# Altium PCB PCB2.0.PcbDoc (part 1 of 2)
Units mm, origin at the board's own origin, x right, y up, seen from the top; angles counter-clockwise.
Board outline 68 x 50 mm, 4 copper layers (Top Layer, GND, VDD3V3, Bottom Layer), stack 0.778 mm thick; 115 components, 143 nets, 635 pads, 198 vias.
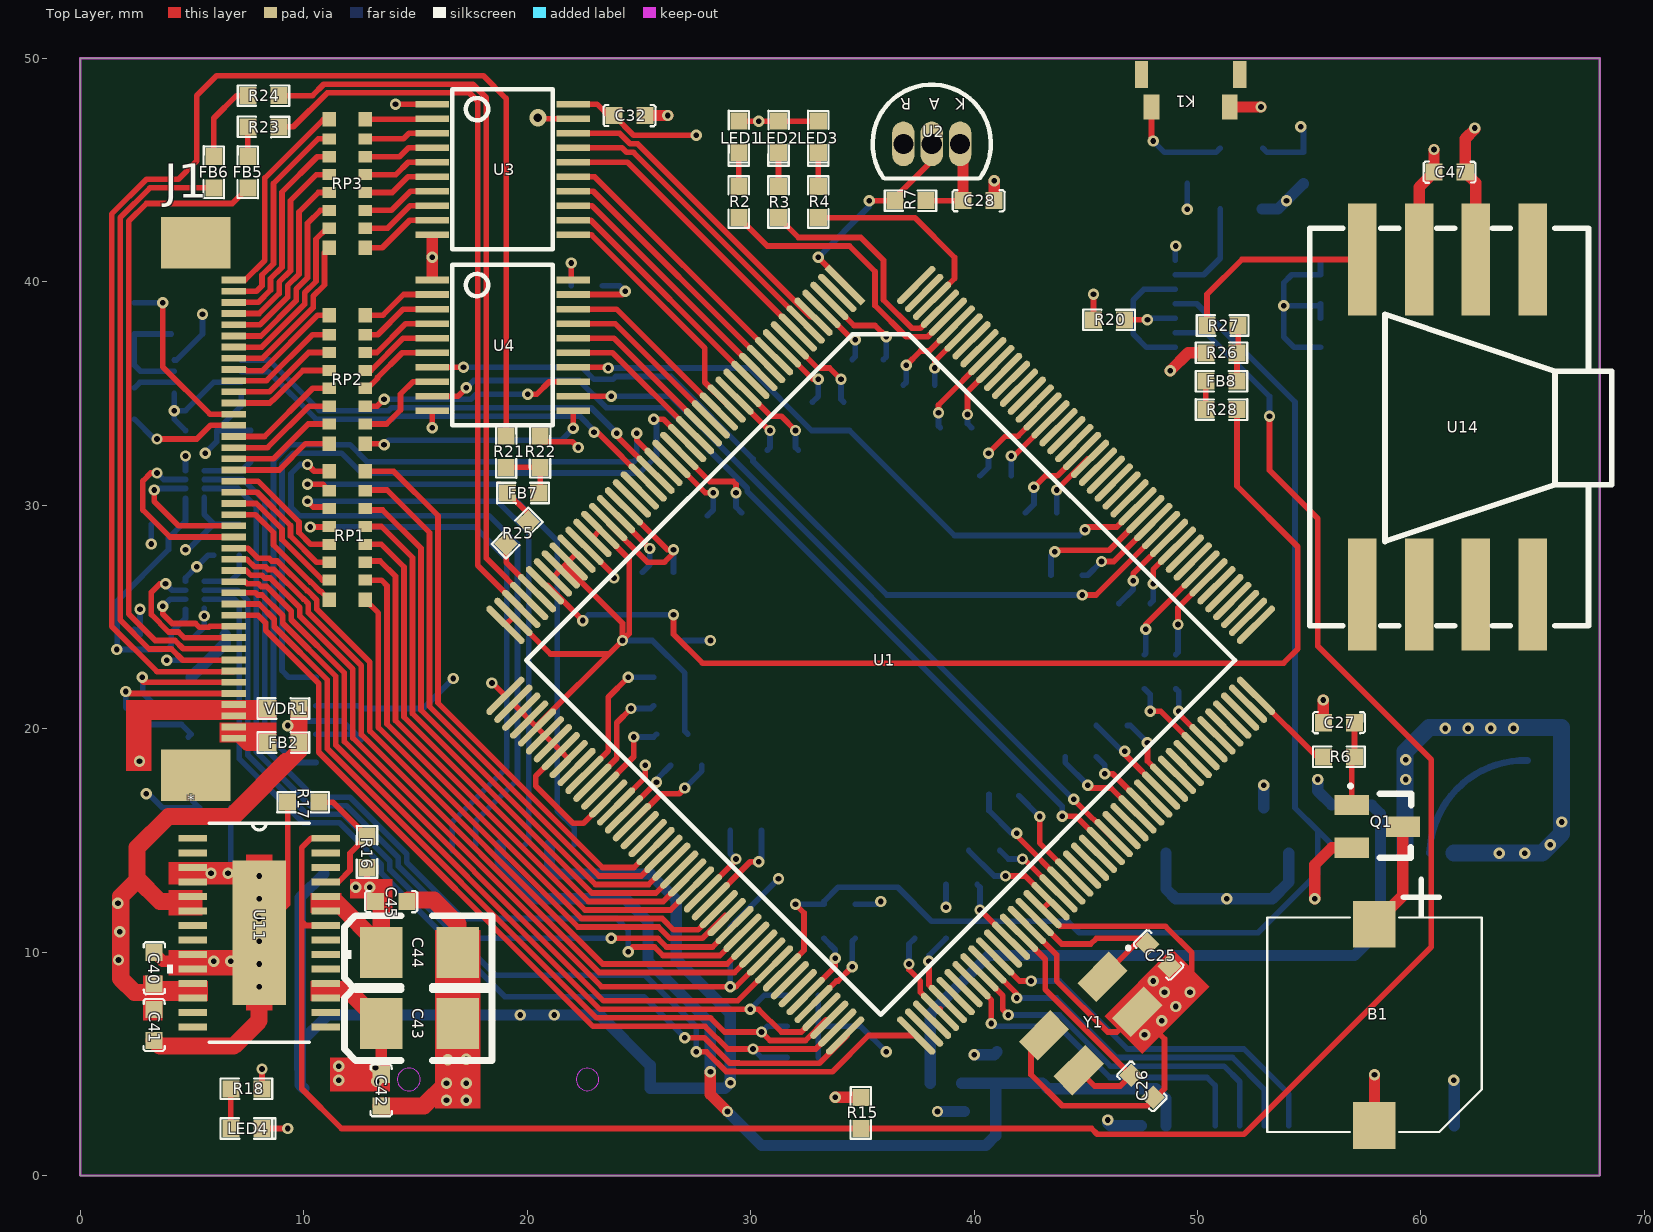
[diagram p0: Top Layer view]
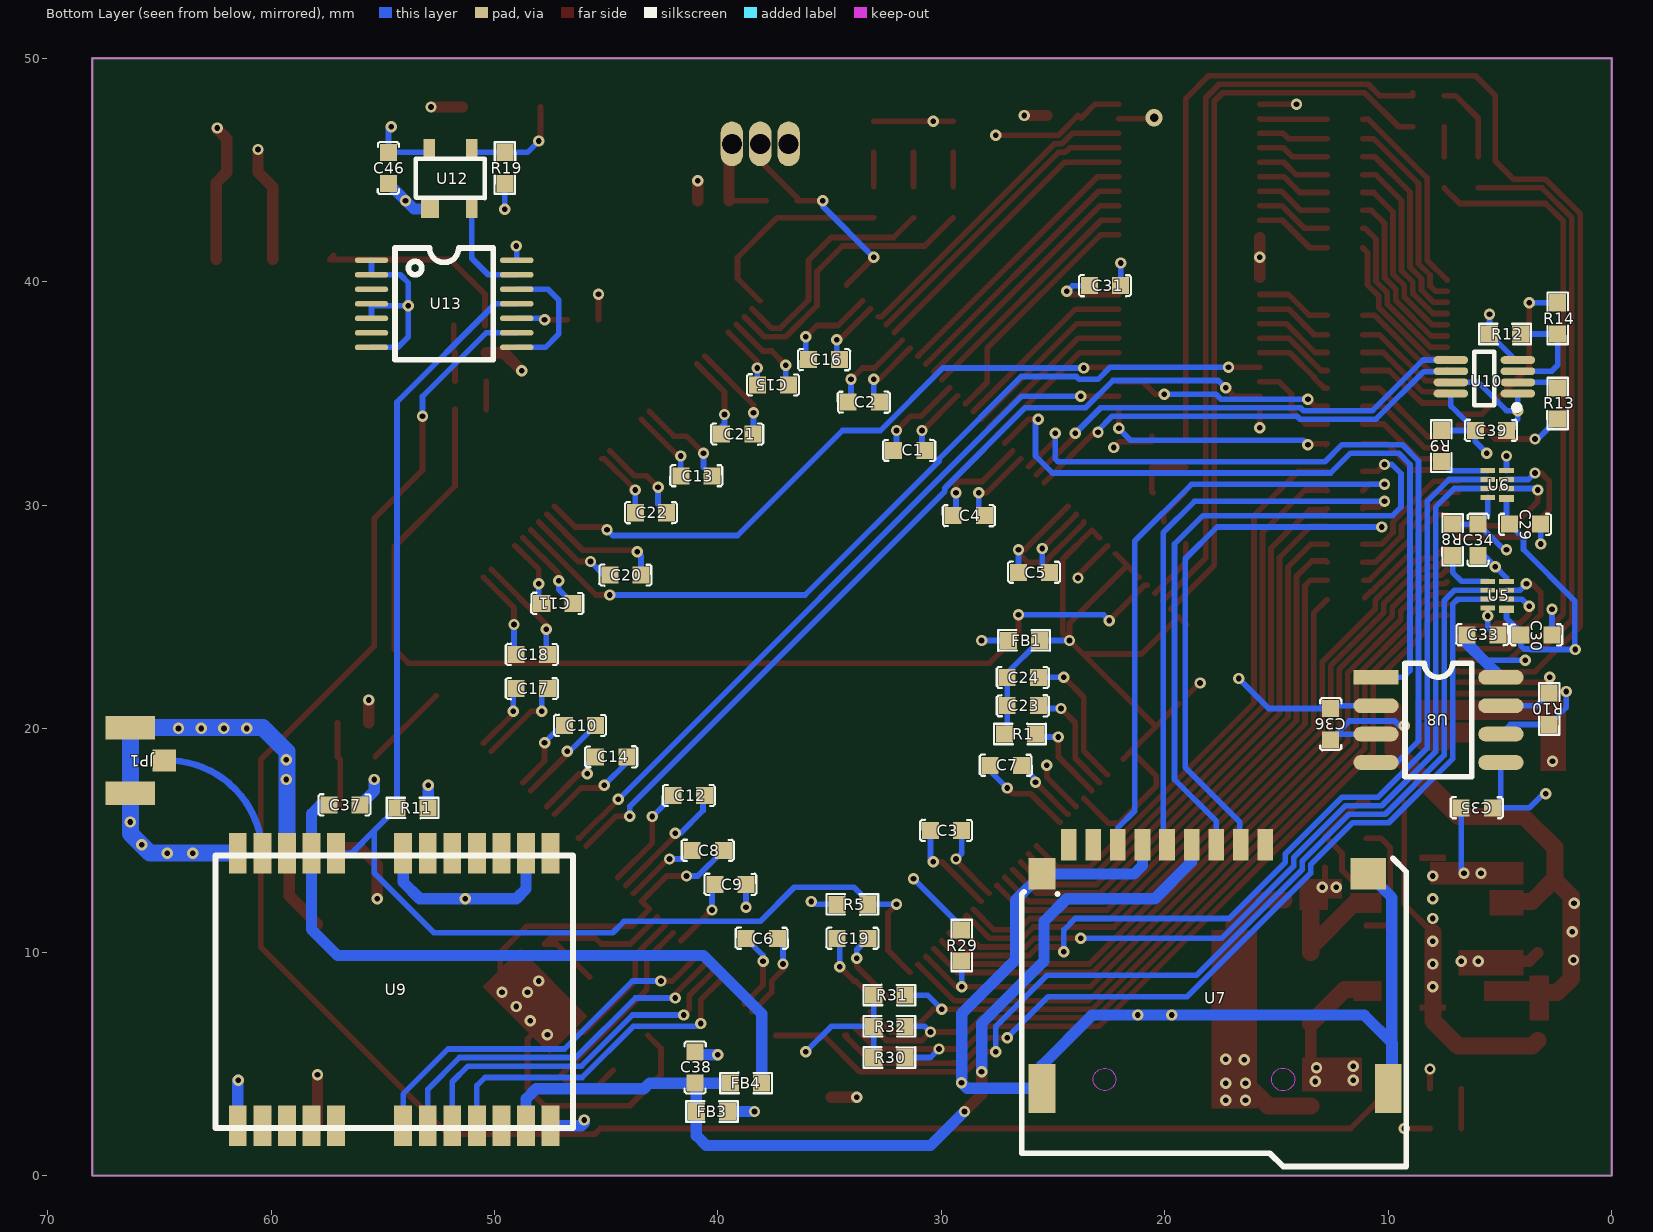
[diagram p1: Bottom Layer view, seen from below]
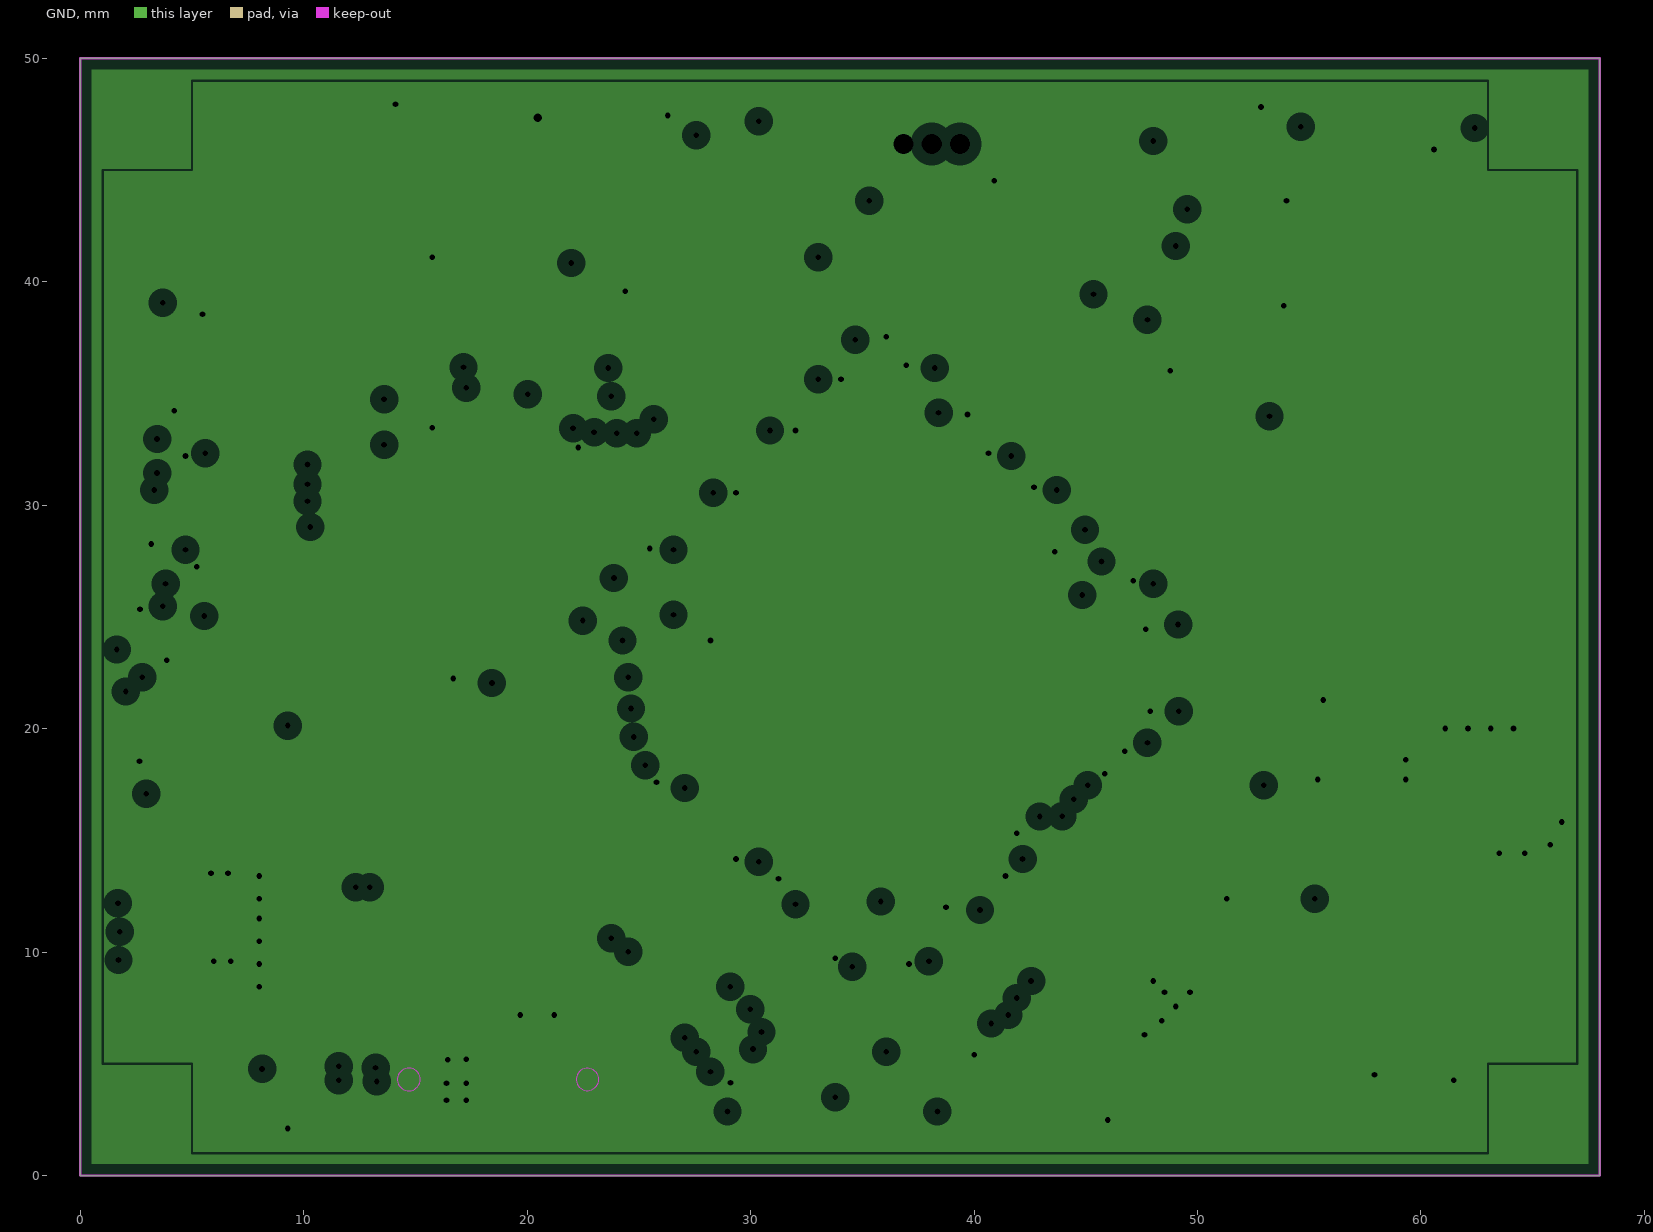
[diagram p2: GND, clearances drawn from the general rule]
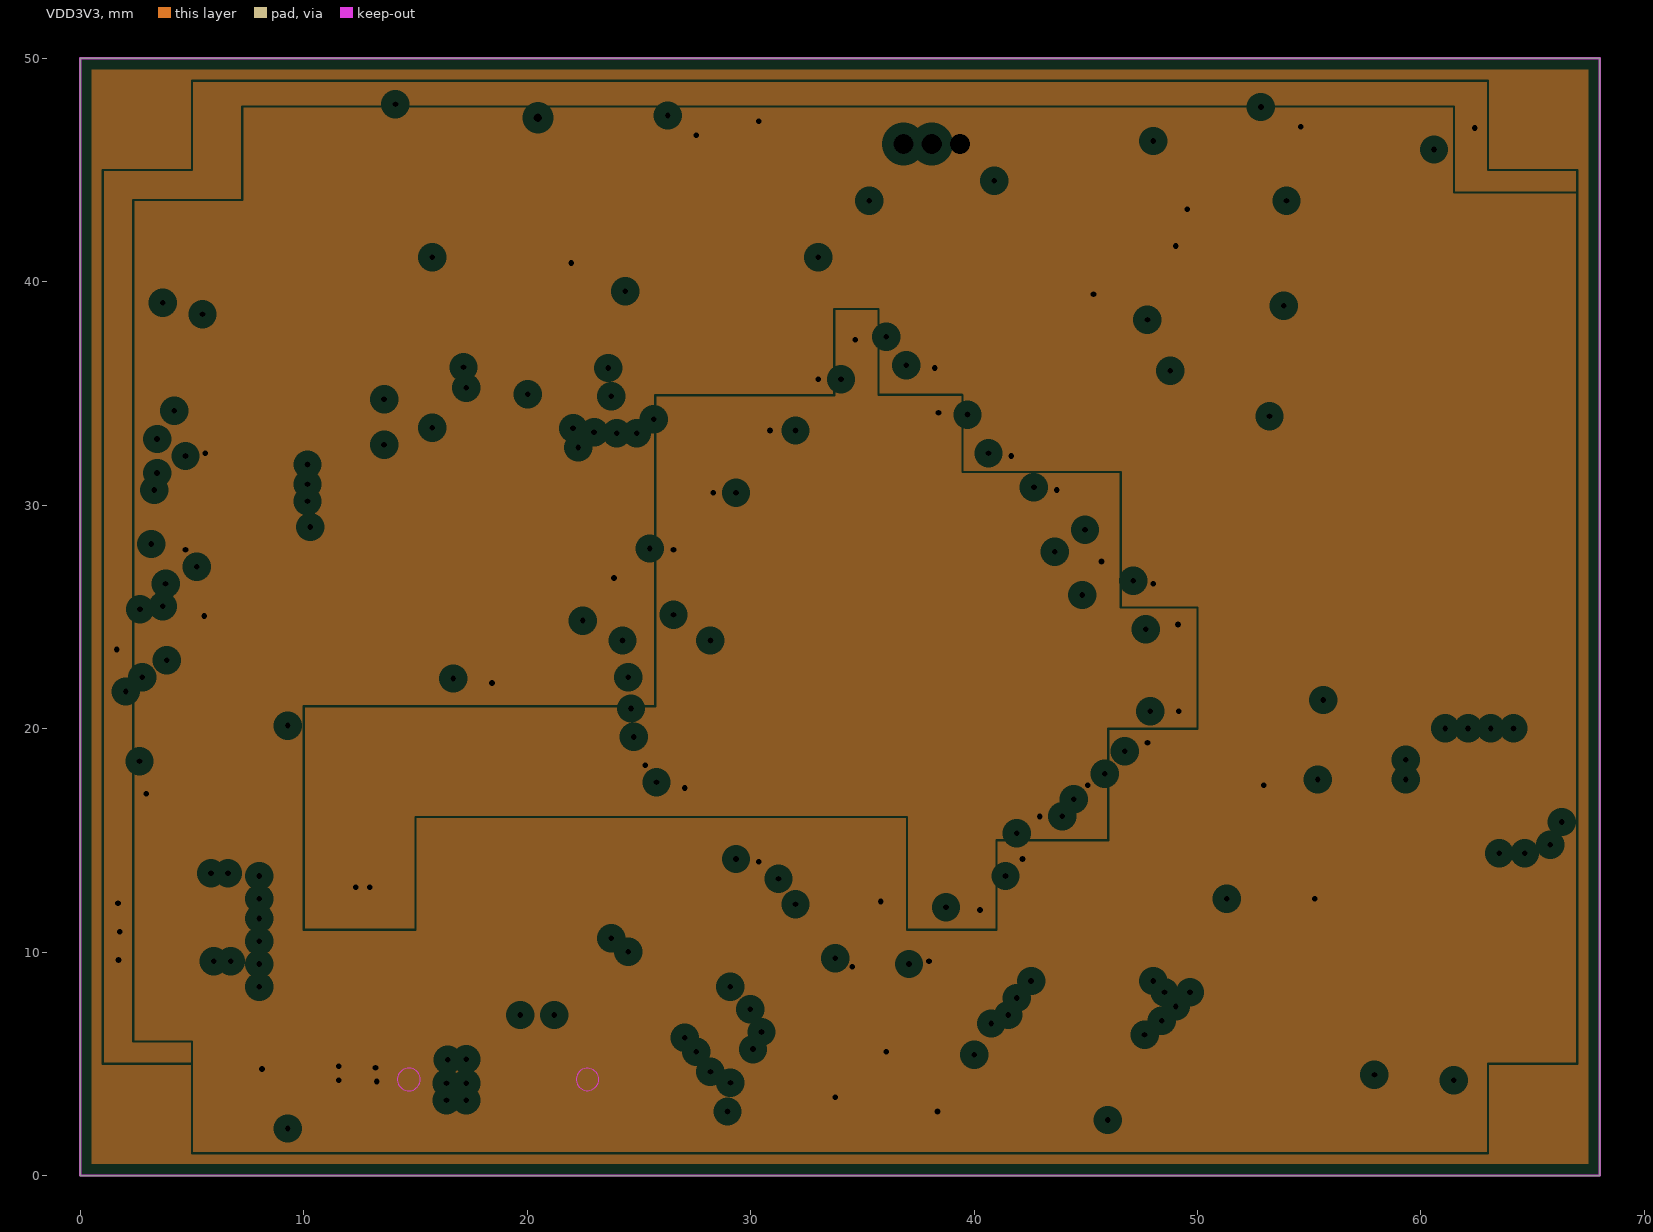
[diagram p3: VDD3V3, clearances drawn from the general rule]

## Layer stack, top to bottom
Top Solder: solder mask 0.0102, Solder Resist, Dk 3.5
Top Layer: signal copper 0.0356
Dielectric 1: core 0.254, FR-4, Dk 4.2
GND: plane copper 0.036, net GND
Dielectric 3: prepreg 0.127, Dk 4.2
VDD3V3: plane copper 0.036, net VDD3V3
Dielectric 2: core 0.254, Dk 4.2
Bottom Layer: signal copper 0.0356
Bottom Solder: solder mask 0.0102, Solder Resist, Dk 3.5

## Board outline
0,0 0,50 68,50 68,0

## Design rules (kind name [scope] priority, off if disabled: settings)
Clearance [All] p1: gap=0.102
HoleToHoleClearance [All] p1: gap=0 allowstackedmicrovias=TRUE
MinimumSolderMaskSliver [All] p1: minsoldermaskwidth=0
PlaneClearance [All] p1: clearance=0.508
PlaneConnect [All] p1: planeconnectstyle=Relief reliefexpansion=0.508 reliefentries=4 reliefconductorwidth=0.508 reliefairgap=0.127
PolygonConnect [All] p1: connectstyle=Relief reliefconductorwidth=1.27 reliefentries=4 polygonreliefangle="90 Angle" airgapwidth=0.254
RoutingVias [All] p1: holewidth=0.254 width=0.508 viastyle="Through Hole" minholewidth=0.254 minwidth=0.508 maxholewidth=0.254 maxwidth=0.508
SilkToSilkClearance [All] p1: silktosilkclearance=0
SilkToSolderMaskClearance [IsPad] p1: minsilkscreentomaskgap=0 clearancetoexposedcopper=TRUE
SolderMaskExpansion [All] p1: expansion=0.102
UnpouredPolygon [All] p1: allowunpoured=FALSE
Width [All] p1: maxlimit=0.762 minlimit=0.102 preferedwidth=0.254
23 further rules are at their usual default settings.

## Classes and differential pairs
component class SBUS: C39 R12 R13 R14 U10
component class PWM&CAN&SD: C29 C30 C31 C32 C33 C34 C35 C36 R8 R9 R10 RP2 RP3 U3 U4 U5 U6 U7 U8
component class POWER: C40 C41 C42 C43 C44 C45 C46 FB2 FB3 FB4 K1 LED4 R15 R16 R17 R18 R19 R20 U11 U12 U13 VDR1
component class IO: J1 R29 R30 R31 R32
component class GPS: C37 C38 JP1 R11 U9
component class F28335: B1 C1 C2 C3 C4 C5 C6 C7 C8 C9 C10 C11 C12 C13 C14 C15 C16 C17 C18 C19 C20 C21 C22 C23 C24 C25 C26 C27 C28 FB1 LED1 LED2 LED3 Q1 R1 R2 R3 R4 R5 R6 R7 RP1 U1 U2 Y1
component class AD: C47 FB5 FB6 FB7 FB8 R21 R22 R23 R24 R25 R26 R27 R28 U14

## Components (designator, comment, footprint, x,y, rotation, side; value= is the part's Value field where it differs from the comment)
B1 "BUZZER" SMD-Beep(9.6*9.6) 57.918,11.247 r0 top
C1 "0.1uF" 0603C 30.74,32.456 r0 bottom
C2 "0.1uF" 0603C 32.772,34.615 r0 bottom
C3 "0.1uF" 0603C 30.486,15.438 r180 bottom
C4 "0.1uF" 0603C 28.073,29.535 r0 bottom
C5 "0.1uF" 0603C 26.549,26.995 r180 bottom
C6 "0.1uF" 0603C 38.741,10.612 r180 bottom
C7 "0.1uF" 0603C 27.819,18.359 r180 bottom
C8 "0.1uF" 0603C 41.154,14.549 r180 bottom
C9 "0.1uF" 0603C 40.138,13.025 r180 bottom
C10 "0.1uF" 0603C 46.869,20.137 r180 bottom
C11 "0.1uF" 0603C 47.885,25.598 r180 bottom
C12 "0.1uF" 0603C 42,17 r180 bottom
C13 "0.1uF" 0603C 41.662,31.313 r180 bottom
C14 "0.1uF" 0603C 44.075,18.74 r0 bottom
C15 "0.1uF" 0603C 38.233,35.377 r180 bottom
C16 "0.1uF" 0603C 34.55,36.52 r0 bottom
C17 "0.1uF" 0603C 49.028,21.788 r180 bottom
C18 "0.1uF" 0603C 49.028,23.312 r180 bottom
C19 "0.1uF" 0603C 34.677,10.612 r180 bottom
C20 "0.1uF" 0603C 44.837,26.868 r180 bottom
C21 "0.1uF" 0603C 38.436,33.193 r0 bottom
C22 "0.1uF" 0603C 43.694,29.662 r180 bottom
C23 "2.2uF" 0603C 25.66,21.026 r0 bottom
C24 "2.2uF" 0603C 25.66,22.296 r0 bottom
C25 "24pF" 0603C 47.758,10.358 r315 top
C26 "24pF" 0603C 48.012,3.5 r135 top
C27 "0.1uF" 0603C 55.632,20.264 r0 top
C28 "0.1uF" 0603C 40.9,43.632 r180 top
C29 "0.1uF" 0603C 3.181,29.154 r0 bottom
C30 "0.1uF" 0603C 2.673,24.201 r0 bottom
C31 "0.1uF" 0603C 23.374,39.822 r180 bottom
C32 "0.1uF" 0603C 25.279,47.442 r180 top
C33 "0.1uF" 0603C 6.483,24.201 r180 bottom
C34 "0.1uF" 0603C 5.975,27.757 r90 bottom
C35 "0.1uF" 0603C 6.737,16.454 r180 bottom
C36 "0.1uF" 0603C 12.579,20.899 r270 bottom
C37 "0.1uF" 0603C 57.41,16.581 r180 bottom
C38 "0.1uF" 0603C 41.027,5.532 r270 bottom
C39 "0.1uF" 0603C 6.102,33.345 r180 bottom
C40 "0.1uF" 0603C 3.308,9.977 r270 top
C41 "10uF" 0603C 3.308,6.04 r90 top
C42 "0.1uF" 0603C 13.468,3.119 r90 top
C43 "10uF/6.3V" 3528/B 16.897,6.802 r180 top
C44 "10uF/6.3V" 3528/B 16.897,9.977 r180 top
C45 "0.1uF" 0603C 14.611,12.263 r180 top
C46 "0.1uF" 0603C 54.743,44.394 r90 bottom
C47 "0.1uF" 0603C 60.585,44.902 r0 top
FB1 "742792625" 0603-FB 26.295,23.947 r180 bottom
FB2 "742792625" 0603-FB 9.086,19.375 r0 top
FB3 "742792625" 0603-FB 40.265,2.865 r0 bottom
FB4 "742792625" 0603-FB 38.741,4.135 r180 bottom
FB5 "742792625" 0603-FB 7.499,44.902 r90 top
FB6 "742792625" 0603-FB 5.975,44.902 r90 top
FB7 "742792625" 0603-FB 19.818,30.551 r180 top
FB8 "742792625" 0603-FB 51.073,35.55 r180 top
J1 "HEAD1X42/4-1734592-2" FPC0.5-42 6.864,40.076 r270 top
JP1 "ANTINA(NC)" IPEX-20279-00E-03 64,16 r180 bottom
K1 "RESET_Key" KEY(2*4*3.5) 51.441,47.823 r180 top
LED1 "RED" 0603D 29.47,47.188 r270 top
LED2 "GRREN" 0603D 31.248,47.188 r270 top
LED3 "BLUE" 0603D 33.026,47.188 r270 top
LED4 "RED" 0603D 6.737,2.103 r0 top
Q1 "8550" SOT23-PNP 56.902,16.581 r270 top
R1 "24.9K/1%" 0603R 27.184,19.756 r180 bottom
R2 "1K" 0603R 29.47,42.87 r90 top
R3 "500" 0603R 31.248,42.87 r90 top
R4 "1K" 0603R 33.026,42.87 r90 top
R5 "10K" 0603R 33.28,12.136 r0 bottom
R6 "1K" 0603R 55.632,18.74 r0 top
R7 "10K" 0603R 37.852,43.632 r180 top
R8 "10K" 0603R 7.118,27.757 r90 bottom
R9 "10K" 0603R 7.626,31.948 r90 bottom
R10 "120" 0603R 2.8,21.585 r270 bottom
R11 "10K" 0603R 52.965,16.454 r0 bottom
R12 "10K" 0603R 4.07,37.663 r0 bottom
R13 "220" 0603R 2.419,33.853 r90 bottom
R14 "220" 0603R 2.419,39.06 r270 bottom
R15 "10K" 0603R 34.931,2.103 r90 top
R16 "18.2K/1%" 0603R 12.833,13.787 r90 top
R17 "30.1K/1%" 0603R 9.277,16.708 r0 top
R18 "10K" 0603R 6.737,3.881 r0 top
R19 "10K" 0603R 49.536,45.791 r270 bottom
R20 "10K" 0603R 46.742,38.298 r180 top
R21 "2K/0.1%" 0603R 19.056,33.091 r270 top
R22 "1K/0.1%" 0603R 20.58,31.694 r90 top
R23 "10K/0.1%" 0603R 8.896,46.934 r180 top
R24 "10K/0.1%" 0603R 8.896,48.331 r180 top
R25 "10K/0.1%" 0603R 19.056,28.265 r45 top
R26 "1K/0.1%" 0603R 50.374,36.82 r0 top
R27 "667/0.1%" 0603R 51.822,38.044 r180 top
R28 "10K/0.1%" 0603R 51.771,34.28 r180 top
R29 "10K" 0603R 29.089,10.993 r270 bottom
R30 "10K" 0603R 33.026,5.278 r180 bottom
R31 "10K" 0603R 33.026,8.072 r180 bottom
R32 "10K" 0603R 33.026,6.675 r180 bottom
RP1 "YC248/220" YC248 11.944,28.646 r270 top
RP2 "YC248/220" YC248 11.944,35.631 r270 top
RP3 "YC248/220" YC248 11.944,44.394 r270 top
U1 "TMS320F28335" LQFP-176 35.82,23.058 r315 top
U2 "DS18B20" TO-92 36.836,46.172 r180 top
U3 "74HC245" TSSOP20 15.754,47.95 r270 top
U4 "74HC245" TSSOP20 15.754,40.076 r270 top
U5 "NLSX4373" UDFN8 4.705,25.344 r0 bottom
U6 "NLSX4373" UDFN8 4.705,30.297 r0 bottom
U7 "MICROSD_SPI" microsd 25.5,13.5 r180 bottom
U8 "MC33901" SOIC-8 7.753,20.391 r180 bottom
U9 "ubox-M8N" ublox-M8 54.489,8.326 r90 bottom
U10 "74LVC2G240" VSSOP8-0.5 4.197,34.996 r0 bottom
U11 "TPS767D301" TPS767D301 8.007,10.866 r0 top
U12 "IMP811" IMP811 51.971,44.505 r180 bottom
U13 "74HC08D" TSSOP14 55.505,40.965 r270 bottom
U14 "MPXV7002DP" MPXV7002DP 65,41 r270 top
VDR1 "82536040" 0603R 8.388,20.899 r0 top
Y1 "30M" 5032Y 45.218,6.802 r225 top

## Footprints (in the part's own frame and the unit in brackets; to place one, negate y for a bottom-side part, rotate by r counter-clockwise, add the part's x,y. Pads: shape width x height; smd on the part's side, far side on the other; paste and mask are expansions set on the pad)
0603-FB [mil]
  rect 30x30 smd: 1(-27.5,0) 2(27.5,0)
  silkscreen extent -46,-18 46,18
0603C [mil]
  rect 30x30 smd: 1(0,0) 2(55,0)
  silkscreen extent -19,-18 73,19
0603D [mil]
  rect 30x30 smd: 1(0,0) 2(55,0)
  silkscreen extent -18,-18 79,18
0603R [mil]
  rect 30x30 smd: 1(0,0) 2(55,0)
  silkscreen extent -18,-18 73,18
3528/B [mil]
  rect 75x90 smd: 1(135,0) 2(0,0)
  silkscreen extent -60,-65 200,65
5032Y [mm]
  rect 2x1.2 smd: 1(-1.85,-1.1) 2(1.85,-1.1) 3(1.85,1.1) 4(-1.85,1.1)
  silkscreen extent -3.6,-1.22 -3.56,-1.18
FPC0.5-42 [mm]
  rect 2.3x3.1 smd: 0(-1.67,-1.7) 0(22.17,-1.7)
  rect 0.3x1.1 smd: 1(0,0) 2(0.5,0) 3(1,0) 4(1.5,0) 5(2,0) 6(2.5,0) 7(3,0) 8(3.5,0) 9(4,0) 10(4.5,0) 11(5,0) 12(5.5,0) 13(6,0) 14(6.5,0) 15(7,0) 16(7.5,0) 17(8,0) 18(8.5,0) 19(9,0) 20(9.5,0) 21(10,0) 22(10.5,0) 23(11,0) 24(11.5,0) 25(12,0) 26(12.5,0) 27(13,0) 28(13.5,0) 29(14,0) 30(14.5,0) 31(15,0) 32(15.5,0) 33(16,0) 34(16.5,0) 35(17,0) 36(17.5,0) 37(18,0) 38(18.5,0) 39(19,0) 40(19.5,0) 41(20,0) 42(20.5,0)
IMP811 [mm]
  rect 0.8x0.8 smd: 1(-0.923,-1.25)
  rect 0.5x0.8 smd: 2(0.952,-1.25) 3(0.952,1.475) 4(-0.948,1.475)
  silkscreen extent -1.55,-0.77 1.53,1
IPEX-20279-00E-03 [mm]
  rect 2.2x1.05 smd: 1(-2.3,1.1) 1(-2.3,4.05)
  rect 1.05x1 smd: 2(-0.775,2.575)
KEY(2*4*3.5) [mm]
  rect 0.6x1.2 smd: 0(-0.45,-1.45) 0(3.95,-1.45)
  rect 0.7x1.1 smd: 1(0,0) 2(3.5,0)
LQFP-176 [mm]
  rect 2.3x0.3 smd: 1(-13,10.75)
  oval 2.3x0.3 smd: 2(-13,10.25) 3(-13,9.75) 4(-13,9.25) 5(-13,8.75) 6(-13,8.25) 7(-13,7.75) 8(-13,7.25) 9(-13,6.75) 10(-13,6.25) 11(-13,5.75) 12(-13,5.25) 13(-13,4.75) 14(-13,4.25) 15(-13,3.75) 16(-13,3.25) 17(-13,2.75) 18(-13,2.25) 19(-13,1.75) 20(-13,1.25) 21(-13,0.75) 22(-13,0.25) 23(-13,-0.25) 24(-13,-0.75) 25(-13,-1.25) 26(-13,-1.75) 27(-13,-2.25) 28(-13,-2.75) 29(-13,-3.25) 30(-13,-3.75) 31(-13,-4.25) 32(-13,-4.75) 33(-13,-5.25) 34(-13,-5.75) 35(-13,-6.25) 36(-13,-6.75) 37(-13,-7.25) 38(-13,-7.75) 39(-13,-8.25) 40(-13,-8.75) 41(-13,-9.25) 42(-13,-9.75) 43(-13,-10.25) 44(-13,-10.75) 89(13,-10.75) 90(13,-10.25) 91(13,-9.75) 92(13,-9.25) 93(13,-8.75) 94(13,-8.25) 95(13,-7.75) 96(13,-7.25) 97(13,-6.75) 98(13,-6.25) 99(13,-5.75) 100(13,-5.25) 101(13,-4.75) 102(13,-4.25) 103(13,-3.75) 104(13,-3.25) 105(13,-2.75) 106(13,-2.25) 107(13,-1.75) 108(13,-1.25) 109(13,-0.75) 110(13,-0.25) 111(13,0.25) 112(13,0.75) 113(13,1.25) 114(13,1.75) 115(13,2.25) 116(13,2.75) 117(13,3.25) 118(13,3.75) 119(13,4.25) 120(13,4.75) 121(13,5.25) 122(13,5.75) 123(13,6.25) 124(13,6.75) 125(13,7.25) 126(13,7.75) 127(13,8.25) 128(13,8.75) 129(13,9.25) 130(13,9.75) 131(13,10.25) 132(13,10.75)
  oval 0.3x2.3 smd: 45(-10.75,-13) 46(-10.25,-13) 47(-9.75,-13) 48(-9.25,-13) 49(-8.75,-13) 50(-8.25,-13) 51(-7.75,-13) 52(-7.25,-13) 53(-6.75,-13) 54(-6.25,-13) 55(-5.75,-13) 56(-5.25,-13) 57(-4.75,-13) 58(-4.25,-13) 59(-3.75,-13) 60(-3.25,-13) 61(-2.75,-13) 62(-2.25,-13) 63(-1.75,-13) 64(-1.25,-13) 65(-0.75,-13) 66(-0.25,-13) 67(0.25,-13) 68(0.75,-13) 69(1.25,-13) 70(1.75,-13) 71(2.25,-13) 72(2.75,-13) 73(3.25,-13) 74(3.75,-13) 75(4.25,-13) 76(4.75,-13) 77(5.25,-13) 78(5.75,-13) 79(6.25,-13) 80(6.75,-13) 81(7.25,-13) 82(7.75,-13) 83(8.25,-13) 84(8.75,-13) 85(9.25,-13) 86(9.75,-13) 87(10.25,-13) 88(10.75,-13) 133(10.75,13) 134(10.25,13) 135(9.75,13) 136(9.25,13) 137(8.75,13) 138(8.25,13) 139(7.75,13) 140(7.25,13) 141(6.75,13) 142(6.25,13) 143(5.75,13) 144(5.25,13) 145(4.75,13) 146(4.25,13) 147(3.75,13) 148(3.25,13) 149(2.75,13) 150(2.25,13) 151(1.75,13) 152(1.25,13) 153(0.75,13) 154(0.25,13) 155(-0.25,13) 156(-0.75,13) 157(-1.25,13) 158(-1.75,13) 159(-2.25,13) 160(-2.75,13) 161(-3.25,13) 162(-3.75,13) 163(-4.25,13) 164(-4.75,13) 165(-5.25,13) 166(-5.75,13) 167(-6.25,13) 168(-6.75,13) 169(-7.25,13) 170(-7.75,13) 171(-8.25,13) 172(-8.75,13) 173(-9.25,13) 174(-9.75,13) 175(-10.25,13) 176(-10.75,13)
  silkscreen extent -11.21,-11.21 11.21,11.21
microsd [mm]
  rect 0.7x1.4 smd: 1(10,1.3) 2(8.9,1.3) 3(7.8,1.3) 4(6.7,1.3) 5(5.6,1.3) 6(4.5,1.3) 7(3.4,1.3) 8(2.3,1.3) 9(1.2,1.3)
  rect 1.2x1.4 smd: 10(0,0)
  rect 1.2x2.2 smd: 10(0,-9.6) 10(15.5,-9.6)
  rect 1.6x1.4 smd: 10(14.6,0)
  Keep-Out Layer circle w0.05: c2.8,-9.2 r0.5
  Keep-Out Layer circle w0.05: c10.8,-9.2 r0.51
  silkscreen extent -0.9,-13.1 16.3,0.7
MPXV7002DP [mm]
  rect 5x1.27 smd: 1(0,0) 2(0,-2.54) 3(0,-5.08) 4(0,-7.62) 5(15,-7.62) 6(15,-5.08) 7(15,-2.54) 8(15,0)
  silkscreen extent -1.39,-9.97 16.39,3.54
SMD-Beep(9.6*9.6) [mm]
  rect 1.9x2.1 smd: 1(0,0) 2(0,-9)
  silkscreen extent -4.8,-9.3 4.8,2
SOIC-8 [mm]
  rect 2.03x0.66 smd: 1(-2.795,1.905)
  oval 2.03x0.66 smd: 2(-2.795,0.635) 3(-2.795,-0.635) 4(-2.795,-1.905) 5(2.795,-1.905) 6(2.795,-0.635) 7(2.795,0.635) 8(2.795,1.905)
  silkscreen extent -1.5,-2.54 1.5,2.54
SOT23-PNP [mil]
  rect 36x60 smd: 1(0,0) 2(75,0) 3(38,90)
  silkscreen extent -34,-2 93,105
TO-92 [mm]
  oval 1x2 hole 0.9: 1(0,0) 2(-1.27,0) 3(-2.54,0)
  silkscreen extent -3.92,-2.65 1.38,1.55
TPS767D301 [mil]
  rect 50x12 smd: 1(-117,166.34) 2(-117,140.75) 3(-117,115.16) 4(-117,89.57) 5(-117,63.98) 6(-117,38.39) 7(-117,12.8) 8(-117,-12.8) 9(-117,-38.39) 10(-117,-63.98) 11(-117,-89.57) 12(-117,-115.16) 13(-117,-140.75) 14(-117,-166.34) 15(117,-166.34) 16(117,-140.75) 17(117,-115.16) 18(117,-89.57) 19(117,-63.98) 20(117,-38.39) 21(117,-12.8) 22(117,12.8) 23(117,38.39) 24(117,63.98) 25(117,89.57) 26(117,115.16) 27(117,140.75) 28(117,166.34)
  rect 94.49x254.33 smd: 29(0,0)
  Top Layer region: 22.64,-127.17 -22.64,-127.17 -22.64,-137.01 22.64,-137.01
  Top Layer region: 22.64,127.17 -22.64,127.17 -22.64,137.01 22.64,137.01
  silkscreen extent -162,-193 162,193, body extent -130,-193 130,193, height 67
TSSOP14 [mm]
  oval 0.25x1.5 smd: 1(0.001,0.001) 2(0.651,0.001) 3(1.301,0.001) 4(1.951,0.001) 5(2.601,0.001) 6(3.251,0.001) 7(3.901,0.001) 8(3.901,6.501) 9(3.251,6.501) 10(2.601,6.501) 11(1.951,6.501) 12(1.301,6.501) 13(0.651,6.501) 14(0.001,6.501)
  silkscreen extent -0.55,1.05 4.45,5.45
TSSOP20 [mm]
  rect 0.3x1.5 smd: 1(0,0) 2(0.65,0) 3(1.3,0) 4(1.95,0) 5(2.6,0) 6(3.25,0) 7(3.9,0) 8(4.55,0) 9(5.2,0) 10(5.85,0) 11(5.85,6.3) 12(5.2,6.3) 13(4.55,6.3) 14(3.9,6.3) 15(3.25,6.3) 16(2.6,6.3) 17(1.95,6.3) 18(1.3,6.3) 19(0.65,6.3) 20(0,6.3)
  silkscreen extent -0.68,0.9 6.5,5.4
ublox-M8 [mm]
  rect 1.8x0.8 smd: 1(6.1,-7) 2(6.1,-5.9) 3(6.1,-4.8) 4(6.1,-3.7) 5(6.1,-2.6) 6(6.1,-1.5) 7(6.1,-0.4) 8(6.1,2.6) 9(6.1,3.7) 10(6.1,4.8) 11(6.1,5.9) 12(6.1,7) 13(-6.1,7) 14(-6.1,5.9) 15(-6.1,4.8) 16(-6.1,3.7) 17(-6.1,2.6) 18(-6.1,-0.4) 19(-6.1,-1.5) 20(-6.1,-2.6) 21(-6.1,-3.7) 22(-6.1,-4.8) 23(-6.1,-5.9) 24(-6.1,-7)
  silkscreen extent -6.2,-8 6,8
UDFN8 [mm]
  rect 0.66x0.32 smd: 1(0,0)
  rect 0.66x0.22 smd: 2(0,-0.45) 3(0,-0.85) 4(0,-1.25) 5(0.84,-1.25) 6(0.84,-0.85) 7(0.84,-0.45) 8(0.84,-0.05)
VSSOP8-0.5 [mm]
  oval 1.55x0.35 smd: 1(0,0) 2(0,-0.5) 3(0,-1) 4(0,-1.5) 5(3,-1.5) 6(3,-1) 7(3,-0.5) 8(3,0)
  silkscreen extent -0.07,-1.88 1.95,0.75
YC248 [mm]
  rect 0.65x0.6 smd: 1(-2.875,-0.8) 8(2.875,-0.8) 9(2.875,0.8) 16(-2.875,0.8)
  rect 0.5x0.6 smd: 2(-2,-0.8) 3(-1.2,-0.8) 4(-0.4,-0.8) 5(0.4,-0.8) 6(1.2,-0.8) 7(2,-0.8) 10(2,0.8) 11(1.2,0.8) 12(0.4,0.8) 13(-0.4,0.8) 14(-1.2,0.8) 15(-2,0.8)

## Part data
B1: "Buzzer"
C1 C2 C3 C4 C5 C6 C7 C8 C9 C10 C11 C12 C13 C14 C15 C16 C17 C18 C19 C20 C21 C22 C23 C24 C25 C26 C27 C28 C29 C30 C31 C32 C33 C34 C35 C36 C37 C38 C39 C40 C41 C42 C45 C46 C47: library part C
C43 C44: library part C-POLAR
FB1 FB2 FB3 FB4 FB5 FB6 FB7 FB8: library part FB
J1: library part HEAD1X42
JP1: library part ANTINA
LED1 LED2 LED3 LED4: library part LED
Q1: library part PNP, "PNP Transistor"
R1 R2 R3 R4 R5 R6 R7 R8 R9 R10 R11 R12 R13 R14 R15 R16 R17 R18 R19 R20 R21 R22 R23 R24 R25 R26 R27 R28 R29 R30 R31 R32: library part R
RP1 RP2 RP3: library part RP
U13: "2-INPUT AND GATE"
VDR1: library part Varistor
Y1: library part Crystal-4

## Via types
v1: diameter 0.508, hole 0.254, Top Layer to Bottom Layer, 197 vias
v2: diameter 0.762, hole 0.381, Top Layer to Bottom Layer, 1 vias

## Nets (pads, with @x,y where several pads share a name; then routed paths per layer and width w, separated by ;. In a path a pad name is that pad's centre, name@x,y a point inside that pad or via, vN(x,y) a via of type N, cw(c..) or ccw(c..) an arc to the next point about the centre after c; other vN are vias at no path point)
AGND: C23.2 C24.2 FB1.2 R1.1 U1.32 U1.33 U1.35 U1.36 U1.37 U1.38 U1.43 U1.44 U1.46 U1.47 U1.48 U1.49 U1.50 U1.51 U1.52 U1.53 U1.58 | length 39
  Top Layer w0.254: U1.44@19.026,24.649 U1.43@19.38,25.003 21.045,23.337 23.628,23.337 ; U1.46@19.38,21.113 U1.47@19.733,20.76 U1.48@20.087,20.406 U1.49@20.44,20.053 U1.50@20.794,19.699 U1.52@21.501,18.992 ; U1.49@20.405,20.089 v1(24.263,23.947) ; U1.38@21.148,26.77 U1.37@21.501,27.124 21.678,27.301 ; U1.53@21.855,18.639 U1.52@21.501,18.992 ; U1.35@22.208,27.831 U1.36@21.855,27.477 21.678,27.301 ; U1.33@22.915,28.538 23.262,28.885 24.568,27.579 24.568,24.252 v1(24.263,23.947) ; U1.58@23.622,16.871 22.52,15.768 22.053,15.768 20.377,17.445 20.377,17.868 U1.52@21.501,18.992 ; 21.678,27.301 24.263,24.716 v1(24.263,23.947)
  Bottom Layer w0.254: v1(24.263,23.947) FB1.2@25.596,23.947 27.057,22.487 C24.2@27.057,22.296 C23.2@27.057,21.026 27.057,19.883 R1.1@27.184,19.756
BAT2S_VOLT: J1.36 R21.1 | length 62.2
  Top Layer w0.254: J1.36@6.864,22.576 6.838,22.55 3.435,22.55 1.403,24.582 1.403,43.028 2.96,44.585 4.387,44.585 5.213,45.41 5.213,48.331 6.102,49.22 18.04,49.22 19.056,48.204 R21.1@19.056,33.091
BAT6S_VOLT_SENSE: FB6.1 J1.35 | length 28.5
  Top Layer w0.254: FB6.1@5.975,44.204 3.117,44.204 1.784,42.87 1.784,24.861 3.079,23.566 4.077,23.566 4.585,23.058 J1.35@6.768,23.058
BAT_CURRENT_SENSE: FB5.1 J1.34 | length 28.9
  Top Layer w0.254: J1.34@6.864,23.576 4.606,23.576 4.235,23.947 3.352,23.947 2.165,25.134 2.165,42.712 2.958,43.505 6.8,43.505 FB5.1@7.499,44.204
BATT2S_VOLT_SENSE: R25.1 U1.40 | length 2.8
  Top Layer w0.254: R25.1@19.056,28.265 19.056,27.448 U1.40@20.44,26.063
BATT6S_VOLT_SENSE: R24.1 U1.41 | length 33.2
  Top Layer w0.254: R24.1@8.896,48.458 R24.1@8.896,48.331 10.389,48.331 10.897,48.839 17.563,48.839 18.167,48.235 18.167,27.63 U1.41@20.087,25.71
BATT_CURRENT_SENSE: R23.1 U1.42 | length 33.2
  Top Layer w0.254: R23.1@8.896,46.934 9.531,46.934 11.055,48.458 17.405,48.458 17.786,48.077 17.786,27.303 U1.42@19.733,25.356
CANRXB: U1.24 U8.4 | length 34.9
  Top Layer w0.254: v1(24.898,33.218) 24.898,32.919 U1.24@26.097,31.72
  Bottom Layer w0.254: U8.4@10.548,18.486 9.607,18.486 8.642,19.451 8.642,31.979 9.373,32.71 12.071,32.71 12.833,31.948 24.771,31.948 24.898,32.075 v1(24.898,33.218)
CANSTB: 
CANTH: J1.37 R10.1 U8.7 | length 7.4
  Top Layer w0.254: v1(2.775,22.296) 2.775,22.135 2.834,22.076 J1.37@6.864,22.076
  Bottom Layer w0.254: v1(2.775,22.296) 2.8,22.271 R10.1@2.8,21.585 3.359,21.026 U8.7@4.958,21.026
CANTL: J1.38 R10.2 U8.6 | length 9.2
  Top Layer w0.254: v1(2.038,21.661) 2.123,21.576 J1.38@6.864,21.576
  Bottom Layer w0.254: v1(2.038,21.661) 2.038,20.95 R10.2@2.8,20.188 4.526,20.188 U8.6@4.958,19.756 U8.6@4.831,19.629
CANTXB: U1.21 U8.1 | length 32.2
  Top Layer w0.254: v1(25.66,33.853) 26.086,33.853 U1.21@27.158,32.781
  Bottom Layer w0.254: U8.1@10.548,22.296 9.328,22.296 9.023,22.601 9.023,31.821 9.531,32.329 11.69,32.329 12.579,31.44 25.025,31.44 25.787,32.202 25.787,33.726 v1(25.66,33.853)
CAP1: J1.32 U5.2 | length 4.9
  Top Layer w0.254: v1(3.689,25.471) 3.689,25.132 4.112,24.709 5.159,24.709 5.335,24.533 5.755,24.533 5.798,24.576 J1.32@6.864,24.576
  Bottom Layer w0.254: v1(3.689,25.471) 4.012,25.794 U5.2@4.705,25.794
CAP2: J1.33 U5.3 | length 6.9
  Top Layer w0.254: v1(3.816,26.487) 3.562,26.487 3.181,26.106 3.181,25.101 3.954,24.328 4.393,24.328 4.647,24.074 6.862,24.074 J1.33@6.864,24.076
  Bottom Layer w0.254: v1(3.816,26.487) 4.109,26.194 U5.3@4.705,26.194
DSP_RST: R5.1 R11.2 U1.80 U9.8 U13.11 | length 60.1
  Top Layer w0.254: U1.80@31.401,9.093 32.391,10.083 32.391,11.755 v1(32.01,12.136)
  Bottom Layer w0.254: v1(32.01,12.136) R5.1@33.28,12.136 33.28,12.263 33.915,12.898 36.582,12.898 38.106,11.374 44.202,11.374 44.71,10.866 52.711,10.866 55.378,13.533 55.378,15.438 ; U13.11@49.004,39.014 49.963,39.014 54.362,34.615 R11.2@54.362,16.454 55.378,15.438 ; U9.8@57.089,14.426 56.39,14.426 55.378,15.438
ECAP5: U1.88 U5.7 | length 42.3
  Top Layer w0.254: v1(27.057,6.167) 27.933,6.167 29.064,5.036 29.464,5.036 29.476,5.024 33.086,5.024 34.326,6.264 U1.88@34.229,6.264
  Bottom Layer w0.254: U5.7@5.545,25.794 6.891,25.794 7.118,25.567 7.118,18.648 9.978,15.787 11.596,15.787 13.468,13.916 13.468,13.532 19,8 25.224,8 v1(27.057,6.167)
ECAP6: U1.89 U5.6 | length 46.4
  Top Layer w0.254: v1(27.565,5.532) 28.029,5.532 28.906,4.655 29.306,4.655 29.318,4.643 33.661,4.643 35.282,6.264 U1.89@37.411,6.264
  Bottom Layer w0.254: U5.6@5.545,26.194 7.03,26.194 7.499,25.725 7.499,18.805 10.136,16.168 11.754,16.168 13.849,14.073 13.849,13.69 18.578,8.961 25.279,8.961 27.565,6.675 v1(27.565,5.532)
EMU0: J1.29 R31.2 U1.85 | length 38.2
  Top Layer w0.254: J1.29@7.372,26.076 7.842,26.076 7.939,25.979 8.134,25.979 9.057,25.056 9.057,24.719 11.436,22.34 11.436,19.259 23.258,7.437 v1(29.978,7.437) 30.359,7.437 31.375,6.421 32.264,6.421 U1.85@33.168,7.325
  Bottom Layer w0.254: v1(29.978,7.437) 30.613,8.072 R31.2@31.629,8.072
EMU1: J1.30 R32.2 U1.86 | length 37.9
  Top Layer w0.254: J1.30@7.372,25.576 7.998,25.576 8.676,24.898 8.676,24.561 11.055,22.182 11.055,19.101 23.1,7.056 28.2,7.056 28.835,6.421 v1(30.486,6.421) 30.867,6.04 32.455,6.04 33.386,6.971 U1.86@33.522,6.971
  Bottom Layer w0.254: v1(30.486,6.421) 30.74,6.675 R32.2@31.629,6.675
EPWM1A: U1.5 U3.18 | length 14.2
  Top Layer w0.254: U3.18@22.054,46.65 24.135,46.65 24.613,46.172 24.945,46.172 32.679,38.438 U1.5@32.815,38.438
EPWM1B: U1.6 U3.17 | length 13.7
  Top Layer w0.254: U3.17@22.054,46 24.246,46 24.455,45.791 24.754,45.791 U1.6@32.461,38.084
EPWM2A: U1.7 U3.16 | length 13.2
  Top Layer w0.254: U3.16@22.054,45.35 24.488,45.35 U1.7@32.108,37.73
EPWM2B: U1.10 U3.15 | length 12.3
  Top Layer w0.254: U3.15@22.054,44.7 23.017,44.7 U1.10@31.047,36.67
EPWM3A: U1.11 U3.14 | length 11.8
  Top Layer w0.254: U3.14@22.054,44.05 22.96,44.05 U1.11@30.693,36.316
EPWM3B: U1.12 U3.13 | length 11.4
  Top Layer w0.254: U3.13@22.054,43.4 22.903,43.4 U1.12@30.34,35.963
EPWM4A: U1.13 U3.12 | length 10.9
  Top Layer w0.254: U3.12@22.054,42.75 22.845,42.75 U1.13@29.986,35.609
EPWM4B: U1.16 U3.11 | length 10.9
  Top Layer w0.254: U3.11@22.054,42.1 22.874,42.1 27.946,37.028 27.946,35.504 28.902,34.548 U1.16@28.926,34.548
EPWM5A: U1.17 U4.18 | length 8.4
  Top Layer w0.254: U4.18@22.054,38.776 23.991,38.776 U1.17@28.572,34.195
EPWM5B: U1.18 U4.17 | length 7.9
  Top Layer w0.254: U4.17@22.054,38.126 23.934,38.126 U1.18@28.219,33.841
EPWM6A: U1.19 U4.16 | length 7.5
  Top Layer w0.254: U4.16@22.054,37.476 23.877,37.476 U1.19@27.865,33.488
EPWM6B: U1.20 U4.15 | length 7
  Top Layer w0.254: U4.15@22.054,36.826 23.82,36.826 U1.20@27.512,33.134
GND: B1.2 C1.2 C2.2 C3.2 C4.2 C5.2 C6.2 C7.2 C8.2 C9.2 C10.2 C11.2 C12.2 C13.2 C14.2 C15.2 C16.2 C17.2 C18.2 C19.2 C20.2 C21.2 C22.2 C25.2 C26.1 C27.1 C28.1 C29.1 C30.1 C31.1 C32.1 C33.1 C34.1 C35.1 C36.1 C37.2 C38.1 C39.2 C40.1 C41.1 C42.1 C43.2 C44.2 C45.1 C46.1 C47.1 FB1.1 J1.39 J1.40 JP1.1 K1.1 LED4.2 R12.2 R17.1 R22.2 R26.1 R29.1 U1.3 U1.8 U1.14 U1.22 U1.30 U1.60 U1.70 U1.83 U1.92 U1.103 U1.105 U1.106 U1.108 U1.118 U1.120 U1.125 U1.140 U1.144 U1.147 U1.155 U1.160 U1.166 U1.171 U2.1 U3.1 U3.10 U3.19 U4.1 U4.10 U4.19 U5.4 U6.4 U7.6 U7.10 U8.2 U8.8 U9.2 U9.7 U9.10 U9.12 U9.13 U9.24 U10.1 U10.4 U10.7 U11.3 U11.4 U11.9 U11.10 U11.29 U12.1 U13.1 U13.2 U13.4 U13.5 U13.7 U14.3 VDR1.1 Y1.2 Y1.4 | length 302.1
  Top Layer w0.254: U11.29@8.007,10.866 9.277,12.136 R17.1@9.277,16.708 ; LED4.2@8.134,2.103 v1(9.277,2.103) ; v1(14.103,47.95) U3.1@15.754,47.95 ; v1(15.754,33.472) U4.10@15.754,34.226 ; v2@20.341,47.3 U3.19@22.054,47.3 ; R22.2@20.58,33.091 20.58,32.837 22.028,32.837 v1(22.282,32.583) ; U4.19@22.054,39.426 24.248,39.426 v1(24.39,39.568) ; U1.30@23.976,29.599 23.976,29.568 v1(25.482,28.062) ; U1.60@24.33,16.164 24.354,16.164 v1(25.787,17.597) ; U1.22@26.804,32.427 28.173,31.059 29.216,31.059 29.343,30.932 v1(29.343,30.551) ; U1.70@27.865,12.628 29.343,14.106 v1(29.343,14.168) ; U1.14@29.633,35.256 30.908,33.98 31.375,33.98 v1(32.01,33.345) ; U1.8@31.754,37.377 32.992,36.139 33.534,36.139 v1(34.042,35.631) ; U1.83@32.461,8.032 33.788,9.359 v1(33.788,9.723) ; U1.3@33.522,39.145 34.623,38.044 35.566,38.044 v1(36.074,37.536) ; v1(36.963,36.266) 37.598,36.901 37.996,36.901 U1.171@39.179,38.084 ; v1(37.09,9.469) 37.09,9.215 37.598,8.707 37.598,8.199 U1.92@38.472,7.325 U1.92@38.472,7.461 ; v1(39.706,34.056) 39.706,35.076 U1.166@40.947,36.316 ; v1(40.646,32.329) 41.408,33.091 41.964,33.091 U1.160@43.068,34.195 ; v1(41.408,13.406) 42.29,13.406 U1.106@43.421,12.275 U1.105@43.068,11.921 43.838,11.151 48.565,11.151 49.739,9.977 49.739,9.012 49.638,8.91 ; v1(41.916,15.311) 41.916,15.194 U1.108@44.128,12.982 ; U1.103@42.361,11.214 43.694,9.881 43.694,8.707 45.98,6.421 46.393,6.421 Y1.4@47.304,7.332 ; v1(42.678,30.805) 43.186,31.313 43.721,31.313 U1.155@44.836,32.427 ; Y1.2@43.132,6.272 42.551,5.691 42.551,4.516 43.948,3.119 47.758,3.119 48.52,3.881 48.52,6.116 Y1.4@47.304,7.332 ; v1(43.618,27.909) 43.694,27.986 46.051,27.986 U1.147@47.664,29.599 ; v1(45.853,17.978) 46.203,17.978 U1.118@47.664,16.517 ; v1(46.742,18.994) 46.742,18.853 U1.120@48.371,17.224 ; v1(47.123,26.614) 47.123,26.936 U1.144@48.725,28.538 ; v1(47.682,24.455) 47.682,24.667 U1.140@50.139,27.124 ; v1(47.885,20.772) 48.359,20.772 U1.125@50.139,18.992 ; C25.2@48.746,9.37 48.746,8.774 Y1.4@47.304,7.332
  Top Layer w0.508: C40.1@3.308,9.977 3.689,9.596 4.832,9.596 ; U4.1@15.754,40.203 U3.10@15.754,41.981 ; C32.1@25.279,47.442 v1(26.295,47.442) ; C28.1@40.9,43.632 v1(40.9,44.521) ; v1(48.774,36.012) 49.582,36.82 R26.1@50.374,36.82 ; K1.1@51.441,47.823 v1(52.838,47.823) ; C27.1@55.632,20.264 v1(55.632,21.28) ; B1.2@57.918,2.247 v1(57.918,4.516) ; U14.3@59.92,41 59.92,44.237 C47.1@60.585,44.902 v1(60.585,45.918)
  Top Layer w0.762: C41.1@3.308,6.04 3.562,5.786 6.864,5.786 8.007,6.929 v1(8.007,8.453) v1(8.007,9.469) v1(8.007,10.485) U11.29@8.007,10.866 ; 6.737,20.899 VDR1.1@8.388,20.899 ; C42.1@13.468,3.119 15.373,3.119 v1(16.389,4.135) ; C45.1@14.674,12.327 15.817,12.327 16.897,11.247 C44.2@16.897,9.977
  Bottom Layer w0.254: C30.1@2.419,24.455 C30.1@2.673,24.201 v1(2.673,25.344) ; v1(3.181,28.265) C29.1@3.181,29.154 ; v1(3.867,23.058) 5.568,23.058 5.644,22.982 ; U10.1@4.197,34.996 v1(4.197,34.234) ; U10.4@4.197,36.496 4.3,36.496 R12.2@5.467,37.663 v1(5.467,38.552) ; U5.4@4.705,26.594 4.705,26.741 v1(5.213,27.249) 5.721,27.757 C34.1@5.975,27.757 ; U6.4@4.705,31.547 v1(4.705,32.202) ; C39.2@4.705,33.345 4.197,33.853 v1(4.197,34.234) ; v1(6.61,13.533) 6.737,13.66 C35.1@6.737,16.454 ; U10.7@7.197,35.496 5.967,35.496 4.705,34.234 v1(4.197,34.234) ; U8.2@10.548,21.026 12.452,21.026 C36.1@12.579,20.899 15.348,20.899 v1(16.694,22.245) ; C31.1@23.374,39.822 24.136,39.822 v1(24.39,39.568) ; C5.2@25.152,26.995 25.482,27.325 v1(25.482,28.062) ; v1(25.787,17.597) 25.787,17.724 C7.2@26.422,18.359 ; FB1.1@26.993,23.947 v1(28.2,23.947) ; R29.1@29.089,10.993 29.089,11.12 v1(31.248,13.279) ; C3.2@29.089,15.438 29.089,14.422 v1(29.343,14.168) ; v1(29.343,30.551) 29.343,29.916 C4.2@29.597,29.662 ; v1(32.01,33.345) 32.01,32.583 C1.2@32.137,32.456 ; C19.2@33.28,10.612 33.788,10.104 v1(33.788,9.723) ; v1(34.042,35.631) 34.042,34.742 C2.2@34.169,34.615 ; C16.2@35.947,36.52 36.074,36.647 v1(36.074,37.536) ; C15.2@36.836,35.377 36.963,35.504 v1(36.963,36.266) ; v1(37.09,9.469) 37.09,10.358 C6.2@37.344,10.612 ; v1(38.741,12.009) C9.2@38.741,13.025 ; v1(39.706,34.056) 39.706,33.65 C21.2@39.884,33.472 ; C8.2@39.757,14.549 40.9,13.406 v1(41.408,13.406) ; C13.2@40.265,31.313 40.646,31.694 v1(40.646,32.329) ; C12.2@40.669,17.066 40.669,16.331 41.689,15.311 v1(41.916,15.311) ; C22.2@42.297,29.662 42.678,30.043 v1(42.678,30.805) ; C20.2@43.44,26.868 43.44,27.732 v1(43.618,27.909) ; C14.2@45.472,18.74 45.853,18.359 v1(45.853,17.978) ; C10.2@45.472,20.137 46.615,18.994 v1(46.742,18.994) ; C11.2@46.488,25.598 47.123,26.233 v1(47.123,26.614) ; C17.2@47.631,21.788 47.885,21.534 v1(47.885,20.772) ; C18.2@47.631,23.312 47.682,23.363 v1(47.682,24.455) ; U13.7@55.504,37.064 54.326,37.064 53.854,37.536 v1(53.854,38.933) ; U13.5@55.504,38.364 U13.4@55.504,39.014 55.423,38.933 v1(53.854,38.933) ; U13.1@55.504,40.964 U13.2@55.504,40.314 54.219,40.314 53.854,39.949 v1(53.854,38.933)
  Bottom Layer w0.508: U8.8@4.958,22.296 5.644,22.982 6.483,23.821 C33.1@6.483,24.201 ; U7.10@9.823,4.783 9.823,5.926 11.08,7.183 23.247,7.183 25.5,4.93 U7.10@25.5,3.9 28.849,3.9 29.089,4.14 29.089,7.245 26.676,9.658 26.676,12.324 U7.10@25.5,13.5 25.494,13.494 21.381,13.494 21,13.875 U7.6@21,14.8 ; U7.10@10,3.9 9.836,4.064 9.836,12.436 U7.10@10.9,13.5 ; v1(40.011,5.405) 40.9,5.405 C38.1@41.027,5.532 ; v1(45.98,2.484) 45.98,2.349 46.103,2.226 U9.24@47.489,2.226 ; U9.2@48.589,14.426 48.589,12.829 49.028,12.39 v1(51.314,12.39) 53.346,12.39 54.089,13.133 U9.7@54.089,14.426 ; U12.1@52.894,43.256 53.605,43.256 C46.1@54.743,44.394 ; v1(55.378,17.724) 55.378,17.216 C37.2@56.013,16.581 ; v1(61.474,4.262) 61.489,4.247 U9.13@61.489,2.226
  Bottom Layer w0.762: U9.10@59.289,14.426 59.289,18.968 60.371,20.05 JP1.1@66.3,20.05 JP1.1@66.3,17.1 66.3,15.311 65.415,14.426 U9.12@61.489,14.426
  other v1: 16.389,3.373 17.278,3.373 17.278,4.135 29.096,4.147 16.44,5.176 17.278,5.202 47.631,6.294 48.393,6.929 19.691,7.183 21.215,7.183 49.028,7.564 48.52,8.199 49.663,8.199 48.012,8.707 5.975,9.596 6.737,9.596 8.007,11.501 8.007,12.39 8.007,13.406 5.848,13.533 63.506,14.426 64.649,14.422 65.792,14.803 66.3,15.819 59.315,17.724 2.648,18.537 59.315,18.613 61.093,20.01 62.109,20.01 63.125,20.01 64.141,20.01 15.754,41.092 53.981,43.632
  other v2: 20.478,47.34
GPS_C\S\: U1.99 U9.18 | length 17.1
  Top Layer w0.254: U1.99@40.947,9.8 42.039,8.707 v1(42.551,8.707)
  Bottom Layer w0.254: v1(42.551,8.707) 43.821,8.707 46.869,5.659 52.076,5.659 54.089,3.646 U9.18@54.089,2.226
GPS_MISO: U1.97 U9.20 | length 16
  Top Layer w0.254: U1.97@40.239,9.093 41.281,8.051 41.281,7.437 v1(41.535,7.183)
  Bottom Layer w0.254: v1(41.535,7.183) 43.821,7.183 46.107,4.897 51.187,4.897 51.889,4.195 U9.20@51.889,2.226
GPS_MOSI: U1.96 U9.21 | length 15.3
  Top Layer w0.254: U1.96@39.886,8.739 40.773,7.852 v1(40.773,6.802)
  Bottom Layer w0.254: v1(40.773,6.802) 40.9,6.675 43.79,6.675 46.076,4.389 50.425,4.389 50.789,4.025 U9.21@50.789,2.226
GPS_SLK: U1.98 U9.19 | length 16.4
  Top Layer w0.254: U1.98@40.593,9.446 41.916,8.123 v1(41.916,7.945)
  Bottom Layer w0.254: v1(41.916,7.945) 43.694,7.945 46.361,5.278 51.568,5.278 52.989,3.857 U9.19@52.989,2.226
I\S\E\N\S\O\R\_\C\S\: J1.22 RP1.8 | length 5.6
  Top Layer w0.254: J1.22@7.372,29.576 7.839,29.576 8.642,28.773 8.642,28.216 10.297,26.561 10.297,26.584 10.739,26.142 10.773,26.142 RP1.8@11.055,25.86
ISENSOR_CLK: J1.21 RP1.7 | length 5.4
  Top Layer w0.254: J1.21@7.372,30.076 7.878,30.076 9.023,28.931 9.023,28.457 10.834,26.646 RP1.7@11.085,26.646
ISENSOR_SIMO: J1.19 RP1.5 | length 5.7
  Top Layer w0.254: J1.19@6.864,31.076 7.955,31.076 9.785,29.246 9.785,28.773 10.312,28.246 RP1.5@11.144,28.246
ISENSOR_SOMI: J1.20 RP1.6 | length 5.9
  Top Layer w0.254: J1.20@6.864,30.576 7.917,30.576 9.404,29.089 9.404,28.615 10.573,27.446 RP1.6@11.144,27.446
NetB1_1: B1.1 Q1.3 | length 4.9
  Top Layer w0.508: B1.1@57.918,11.247 59.188,12.517 Q1.3@59.188,15.616
NetC23_1: C23.1 U1.56 | length 5.1
  Top Layer w0.254: U1.56@22.915,17.578 24.009,18.672 24.009,20.264 v1(24.644,20.899)
  Bottom Layer w0.254: v1(24.644,20.899) 25.533,20.899 C23.1@25.66,21.026
NetC24_1: C24.1 U1.55 | length 6.3
  Top Layer w0.254: U1.55@22.562,17.931 23.628,18.998 23.628,21.407 v1(24.517,22.296)
  Bottom Layer w0.254: v1(24.517,22.296) C24.1@25.66,22.296